# Altium PCB SPARTAN MINI HW2.0 PCB.PcbDoc
Units mm, origin at the board's own origin, x right, y up, seen from the top; angles counter-clockwise.
Board outline 70.1 x 20.1 mm, 2 copper layers (Top Layer, Bottom Layer); 77 components, 53 nets, 231 pads, 0 vias.
Unrouted connection lines stored in the file: 141.
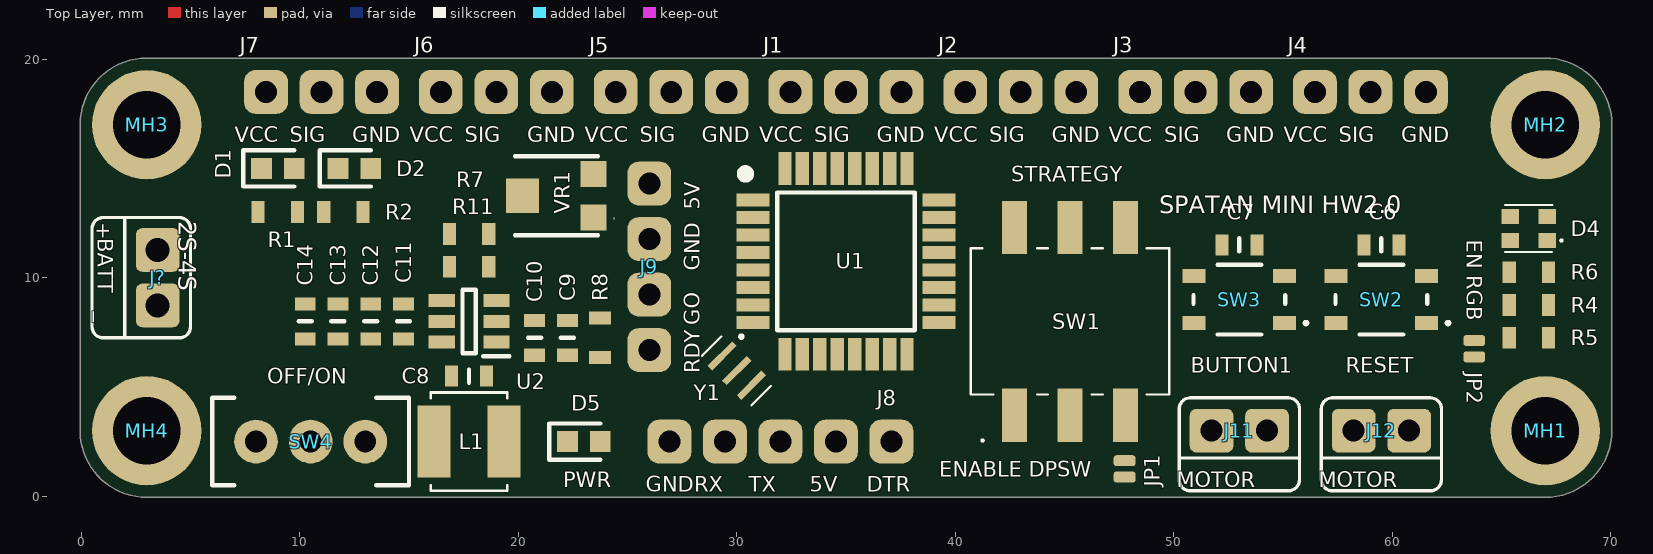
[diagram p0: Top Layer view]
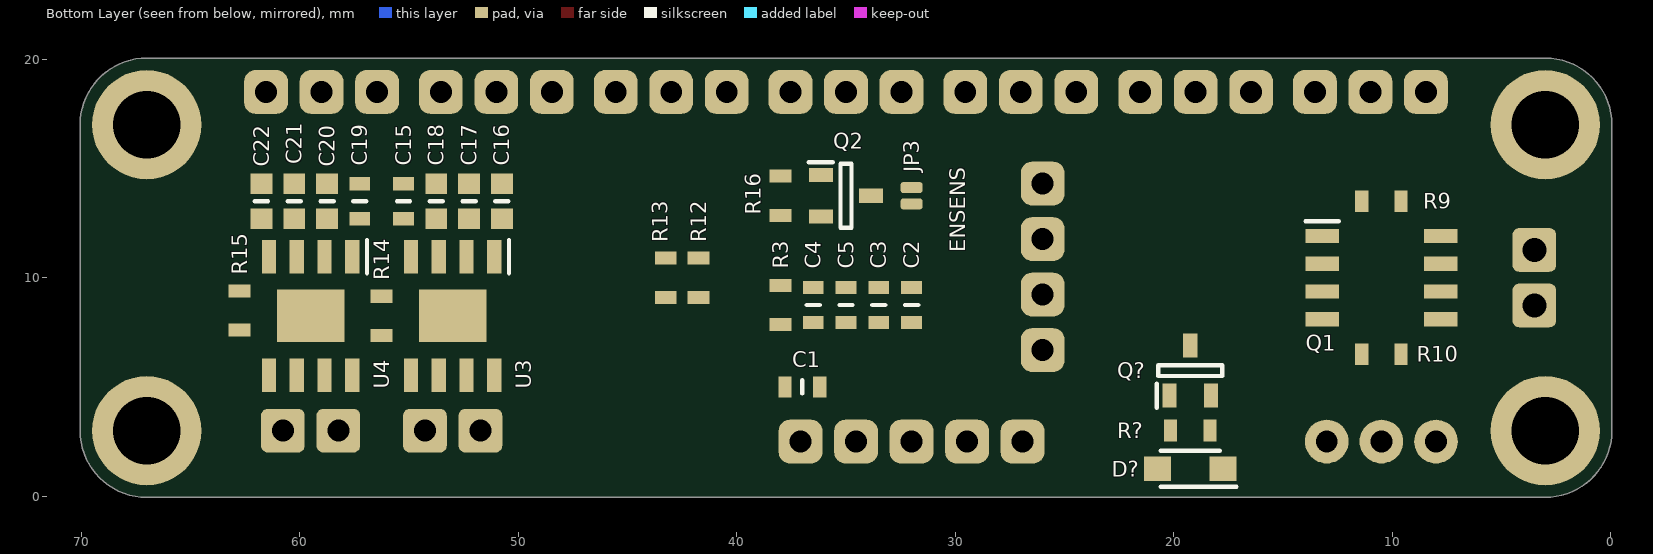
[diagram p1: Bottom Layer view, seen from below]

## Layer stack, top to bottom
Top Solder: solder mask 0.0102, Solder Resist, Dk 3.5
Top Layer: signal copper 0.0356
Dielectric 1: dielectric 0.32, FR-4, Dk 4.8
Bottom Layer: signal copper 0.0356
Bottom Solder: solder mask 0.0102, Solder Resist, Dk 3.5

## Board outline
3,-0.05 cw(c3,3) -0.05,3 -0.05,17 cw(c3,17) 2.999,20.05 3,20.05 66,20.05 67,20.05 cw(c67,17) 70.05,17 70.05,3 cw(c67,3) 67,-0.05 4,-0.05

## Design rules (kind name [scope] priority, off if disabled: settings)
Clearance [All] p1: gap=0.254 ignorepadtopadclearanceinfootprint=FALSE except(0: Arc-Hole Track-Hole SMDPad-Hole THPad-Hole Via-Hole Fill-Hole Poly-Hole Region-Hole Text-Hole)
PolygonConnect [All] p1: connectstyle=Relief reliefconductorwidth=0.254 reliefentries=4 polygonreliefangle="90 Angle" airgapwidth=0.254
RoutingVias [All] p1: holewidth=0.711 width=1.27 viastyle="Through Hole" minholewidth=0.711 minwidth=1.27 maxholewidth=0.711 maxwidth=1.27
SolderMaskExpansion [All] p1: expansion=0.102 istentingtop=FALSE
Width [All] p1: maxlimit=0.254 minlimit=0.254 preferedwidth=0.254
30 further rules are at their usual default settings.

## Classes and differential pairs
component class POWER: C8 C9 C10 C11 C12 C13 C14 C15 C16 C17 C18 C19 C20 C21 C22 D5 D? J11 J12 J? JP3 L1 MH1 MH2 MH3 MH4 Q1 Q2 Q? R7 R8 R9 R10 R11 R12 R13 R14 R15 R16 R? SW4 U2 U3 U4
component class LOGIC: C1 C2 C3 C4 C5 C6 C7 D1 D2 D4 J1 J2 J3 J4 J5 J6 J7 J8 J9 JP1 JP2 R1 R2 R3 R4 R5 R6 SW1 SW2 SW3 U1 VR1 Y1

## Components (designator, comment, footprint, x,y, rotation, side; value= is the part's Value field where it differs from the comment)
C1 "0.1uF" CAP0603 37,5 r0 bottom
C2 "0.1uF" CAP0603 32,8.75 r90 bottom
C3 "0.1uF" CAP0603 33.5,8.75 r90 bottom
C4 "0.1uF" CAP0603 36.5,8.75 r90 bottom
C5 "0.1uF" CAP0603 35,8.75 r90 bottom
C6 "1uF" CAP0603 59.5,11.5 r0 top
C7 "1uF" CAP0603 53,11.5 r0 top
C8 "0.1uF" CAP0603 17.75,5.5 r180 top
C9 "10uF" CAP0603 22.25,7.25 r270 top
C10 "10uF" CAP0603 20.75,7.25 r270 top
C11 "1uF" CAP0603 14.75,8 r270 top
C12 "1uF" CAP0603 13.25,8 r270 top
C13 "1uF" CAP0603 11.75,8 r270 top
C14 "0.1uF" CAP0603 10.25,8 r270 top
C15 "0.1uF" CAP0603 55.25,13.5 r270 bottom
C16 "C22uF" CAP0805 50.75,13.5 r270 bottom
C17 "C22uF" CAP0805 52.25,13.5 r270 bottom
C18 "C22uF" CAP0805 53.75,13.5 r270 bottom
C19 "0.1uF" CAP0603 57.25,13.5 r270 bottom
C20 "C22uF" CAP0805 58.75,13.5 r270 bottom
C21 "C22uF" CAP0805 60.25,13.5 r270 bottom
C22 "C22uF" CAP0805 61.75,13.5 r270 bottom
D1 "G" "LED0603 GREEN" 9,15 r0 top
D2 "R" "LED0603 RED" 12.5,15 r0 top
D4 "RGB" "LED RGB FM-B2020RGBA-HG" 66.25,12.25 r0 top
D5 "PWR" "LED0603 RED" 23,2.5 r0 top
D? "MBR120LSFT1" SOD-123 19.25,1.25 r0 bottom
J1 "GENERIC SENSOR 3X" "PINHEADER SENSOR CONNECTOR 3X" 35,18.5 r0 top
J2 "GENERIC SENSOR 3X" "PINHEADER SENSOR CONNECTOR 3X" 43,18.5 r0 top
J3 "GENERIC SENSOR 3X" "PINHEADER SENSOR CONNECTOR 3X" 51,18.5 r0 top
J4 "GENERIC SENSOR 3X" "PINHEADER SENSOR CONNECTOR 3X" 59,18.5 r0 top
J5 "GENERIC SENSOR 3X" "PINHEADER SENSOR CONNECTOR 3X" 27,18.5 r0 top
J6 "GENERIC SENSOR 3X" "PINHEADER SENSOR CONNECTOR 3X" 19,18.5 r0 top
J7 "GENERIC SENSOR 3X" "PINHEADER SENSOR CONNECTOR 3X" 11,18.5 r0 top
J8 "FTDI CUST" "UART PROG CONN" 32,2.5 r0 top
J9 "RTT" "ING. MAKER RTT" 26,10.5 r90 top
J11 "MOTOR CONN SMALL" "MOTOR CONN SMALL" 53,3 r0 top
J12 "MOTOR CONN SMALL" "MOTOR CONN SMALL" 59.5,3 r0 top
J? "LIPO" "BATTERY CONNECTOR SMALL" 3.5,10 r270 top
JP1 "ENABLE DPSW" "JUMPER 2 PADS" 47.75,1.25 r90 top
JP2 "EN RGB" "JUMPER 2 PADS" 63.75,6.75 r90 top
JP3 "ENSENS" "JUMPER 2 PADS" 32,13.75 r90 bottom
L1 "6.8uH/1.9A" "INDUCTOR 4mm x 4mm x 2mm" 17.75,2.5 r0 top
MH1 "HOLE 3.1mm" "HOLE 3.1mm" 67,3 r0 top
MH2 "HOLE 3.1mm" "HOLE 3.1mm" 67,17 r0 top
MH3 "HOLE 3.1mm" "HOLE 3.1mm" 3,17 r0 top
MH4 "HOLE 3.1mm" "HOLE 3.1mm" 3,3 r0 top
Q1 "30V/8A" SOIC-8 10.5,10 r180 bottom
Q2 "FDN338P" SOT-25-3 35,13.75 r180 bottom
Q? "FDN338P" SOT-25-3 19.25,5.75 r90 bottom
R1 "10KΩ" RES0603 9,13 r180 top
R2 "10KΩ" RES0603 12,13 r180 top
R3 "10KΩ" RES0603 38,8.75 r90 bottom
R4 "10KΩ" RES0603 66.25,8.75 r0 top
R5 "10KΩ" RES0603 66.25,7.25 r0 top
R6 "10KΩ" RES0603 66.25,10.25 r0 top
R7 "88.7KΩ" RES0603 17.75,12 r0 top
R8 "1KΩ" RES0603 23.75,7.25 r270 top
R9 "10KΩ" RES0603 10.5,13.5 r0 bottom
R10 "10KΩ" RES0603 10.5,6.5 r180 bottom
R11 "22.1KΩ" RES0603 17.75,10.5 r0 top
R12 "47KΩ" RES0603 41.75,10 r90 bottom
R13 "4.7K" RES0603 43.25,10 r270 bottom
R14 "18KΩ" RES0603 56.25,8.25 r90 bottom
R15 "18KΩ" RES0603 62.75,8.5 r90 bottom
R16 "10KΩ" RES0603 38,13.75 r90 bottom
R? "10KΩ" RES0603 19.25,3 r180 bottom
SW1 "STRATEGY" 2193MSTR 45.25,8 r0 top
SW2 "RESET" PTS810SJK250SMTRLFS 59.5,9 r180 top
SW3 "BUTTON1" PTS810SJK250SMTRLFS 53,9 r180 top
SW4 "OFF/ON" SS12D00 10.5,2.5 r90 top
U1 "ATMEGA328P-AU" TQFP-32 35,10.75 r0 top
U2 "LMR50410YQDBVRQ1" SOT23-6 17.75,8 r180 top
U3 "DRV8871DDA" "HSOP8 EP" 53,8.25 r270 bottom
U4 "DRV8871DDA" "HSOP8 EP" 59.5,8.25 r270 bottom
VR1 "10KΩ" TC33X2503E 21.75,13.75 r90 top
Y1 "16MHZ" CSTCE16M0V53R0 30,5.75 r135 top

## Footprints (in the part's own frame and the unit in brackets; to place one, negate y for a bottom-side part, rotate by r counter-clockwise, add the part's x,y. Pads: shape width x height; smd on the part's side, far side on the other; paste and mask are expansions set on the pad)
2193MSTR [mm]
  rect 1.13x2.44 smd: 1(-2.54,-4.3) 2(0,-4.3) 3(2.54,-4.3) 4(2.54,4.3) 5(0,4.3) 6(-2.54,4.3)
  silkscreen extent -4.54,-5.5 4.54,3.35, body extent -4.28,-4.9 4.28,4.9, height 4.36
"BATTERY CONNECTOR SMALL" [mm]
  rrect30% 2x2 hole 1.1: 1(-1.27,0) 2(1.27,0)
  silkscreen extent -2.75,-3 2.75,1.5
CAP0603 [mm]
  rect 0.6x0.95 smd: 1(-0.8,0) 2(0.8,0)
  silkscreen extent 0,-0.3 0,0.3, body extent -0.8,-0.4 0.8,0.4, height 0.8
CAP0805 [mm]
  rect 0.95x1 smd: 1(-0.8,0) 2(0.8,0)
  silkscreen extent 0,-0.3 0,0.3, body extent -0.8,-0.4 0.8,0.4, height 0.8
CSTCE16M0V53R0 [mm]
  rect 0.3x1.6 smd: 1(0.95,0) 2(0,0) 3(-0.95,0)
  silkscreen extent -1.6,-1.3 1.6,0.65, body extent -1.6,-0.65 1.6,0.65, height 0.7
"HOLE 3.1mm" [mm]
  round 5 hole 3.1: 13(0,0)
"HSOP8 EP" [mm] "EMPAQUETADO HSOP8 CON TERMAL EXPOSED PAD"
  rect 1.525x0.65 smd: 1(-2.712,1.905) 2(-2.712,0.635) 3(-2.712,-0.635) 4(-2.712,-1.905) 5(2.712,-1.905) 6(2.712,-0.635) 7(2.712,0.635) 8(2.712,1.905)
  rect 2.4x3.1 smd: 9(0,0)
  silkscreen extent -3.47,2.58 -1.95,2.58, body extent -3,-2.45 3,2.45, height 1.57
"INDUCTOR 4mm x 4mm x 2mm" [mm]
  rect 1.5x3.3 smd: 1(-1.6,0) 2(1.6,0)
  silkscreen extent -1.75,-2.25 1.75,2.25, body extent -2,-2.02 2,2, height 2.01
"ING. MAKER RTT" [mm]
  rrect50% 2x2 hole 1: 1(3.81,0) 2(1.27,0) 3(-1.27,0) 4(-3.81,0)
  body extent -5.06,-1.25 5.06,1.25, height 8.5
"JUMPER 2 PADS" [mm]
  rrect50% 0.5x1 smd: 1(-0.375,0) 2(0.375,0)
"LED0603 GREEN" [mm]
  rect 0.95x0.95 smd: 1(-0.75,0) 2(0.75,0)
  silkscreen extent -1.58,-0.82 0.75,0.82, body extent -0.8,-0.4 0.8,0.4, height 0.54
"LED0603 RED" [mm]
  rect 0.95x0.95 smd: 1(-0.75,0) 2(0.75,0)
  silkscreen extent -1.58,-0.82 0.75,0.82, body extent -0.8,-0.4 0.8,0.4, height 0.54
"LED RGB FM-B2020RGBA-HG" [mm]
  rect 0.8x0.7 smd: 1(0.85,-0.55) 2(-0.85,-0.55) 3(-0.85,0.55) 4(0.85,0.55)
  silkscreen extent -1.08,-1.08 1.54,1.08, body extent -1.05,-1.05 1.05,1.05, height 1.01
"MOTOR CONN SMALL" [mm]
  rrect30% 2x2 hole 1: 1(-1.27,0) 2(1.27,0)
  silkscreen extent -2.75,-2.75 2.75,1.5
"PINHEADER SENSOR CONNECTOR 3X" [mm]
  rrect50% 2x2 hole 1: 2(-2.54,0) 3(0,0) 4(2.54,0)
PTS810SJK250SMTRLFS [mm]
  rect 1.05x0.65 smd: 1(-2.075,1.075) 2(2.075,1.075) 3(-2.075,-1.075) 4(2.075,-1.075)
  silkscreen extent -3.1,-1.6 2.1,1.6, body extent -2.3,-1.6 2.3,1.6, height 2.7
RES0603 [mm]
  rect 0.6x1 smd: 1(-0.9,0) 2(0.9,0)
  body extent -0.8,-0.4 0.8,0.4, height 0.55
SOD-123 [mm]
  rect 1.24x1.12 smd: 1(-1.5,0) 2(1.5,0)
  silkscreen extent -2.12,-0.82 1.35,0.82, body extent -1.88,-0.85 1.88,0.85, height 1.2
SOIC-8 [mm] "EMPAQUETADO HSOP8 CON TERMAL EXPOSED PAD"
  rect 1.525x0.65 smd: 1(-2.712,1.905) 2(-2.712,0.635) 3(-2.712,-0.635) 4(-2.712,-1.905) 5(2.712,-1.905) 6(2.712,-0.635) 7(2.712,0.635) 8(2.712,1.905)
  silkscreen extent -3.47,2.58 -1.95,2.58, body extent -3,-2.45 3,2.45, height 1.57
SOT23-6 [mm]
  rect 1.2x0.6 smd: 1(-1.25,0.95) 2(-1.25,0) 3(-1.25,-0.95) 4(1.25,-0.95) 5(1.25,0) 6(1.25,0.95)
  silkscreen extent -1.85,-1.45 0.3,1.6, body extent -1.4,-1.45 1.4,1.45, height 1.2
SOT-25-3 [mm]
  rect 1.1x0.65 smd: 1(-1.15,0.95) 2(-1.15,-0.95) 3(1.15,0)
  silkscreen extent -1.7,-1.46 0.25,1.53, body extent -1.25,-1.46 1.25,1.46, height 1.12
SS12D00 [mm]
  round 2 hole 1: 1(0,-2.5) 2(0,0) 3(0,2.5)
  silkscreen extent -2,-4.5 2,4.5, body extent -1.75,-4.25 1.75,4.25, height 6.21
TC33X2503E [mm]
  rect 1.2x1.2 smd: 1(-1,-1.7) 3(1,-1.7)
  rect 1.6x1.5 smd: 2(0,1.55)
  silkscreen extent -1.8,-2.64 1.8,1.9, body extent -1.5,-2 1.5,1.8, height 1.22
TQFP-32 [mm]
  rect 1.5x0.6 smd: 1(-4.25,2.8) 2(-4.25,2) 3(-4.25,1.2) 4(-4.25,0.4) 5(-4.25,-0.4) 6(-4.25,-1.2) 7(-4.25,-2) 8(-4.25,-2.8) 17(4.25,-2.8) 18(4.25,-2) 19(4.25,-1.2) 20(4.25,-0.4) 21(4.25,0.4) 22(4.25,1.2) 23(4.25,2) 24(4.25,2.8)
  rect 0.6x1.5 smd: 9(-2.8,-4.25) 10(-2,-4.25) 11(-1.2,-4.25) 12(-0.4,-4.25) 13(0.4,-4.25) 14(1.2,-4.25) 15(2,-4.25) 16(2.8,-4.25) 25(2.8,4.25) 26(2,4.25) 27(1.2,4.25) 28(0.4,4.25) 29(-0.4,4.25) 30(-1.2,4.25) 31(-2,4.25) 32(-2.8,4.25)
  silkscreen extent -4.8,-3.15 3.15,4.2, body extent -4.5,-4.5 4.5,4.5, height 1.2
"UART PROG CONN" [mm]
  rrect50% 2x2 hole 1: 5V(2.54,0) DTR(5.08,0) GND(-5.08,0) RX(-2.54,0) TX(0,0)
  body extent -6.34,-1.25 6.32,1.25, height 8.51

## Part data
C1 C2 C3 C4 C5 C15 C19: library part "C0.1uF 25V X7R", "Capacitor, Multilayer, Ceramic, 25V, 10%, X7R, 15% Tc, 0.1Uf, Surface Mount, 0603", Capacitance=100nF, Case Code (Imperial)=0603, Case Code (Metric)=1608, Dielectric=X7R, Dielectric Material=Ceramic, Manufacturer=KEMET, Manufacturer Part Number=C0603C104K3RACTU, Max Operating Temperature=125°C, Min Operating Temperature=-55°C, Package Quantity=1, Temperature Coefficient=30ppm/°C, Tolerance=10%, Voltage=25V, Case/Package=0603, Category="Ceramic Capacitors", Construction=Flat, Depth=0.8mm, Dissipation Factor=3.5%, Height=0.8mm, Lead Free=5697LeadFree, Lead Pitch=0.7mm, Length=1.6mm, Material=4241ConductorMaterial, Mount="Surface Mount,PCB", Number of Pins=2, Packaging="Tape and Reel", Pricing 1="1=0.19, 10=0.12, 50=0.12, 100=0.062, 1000=0.041, 10000=0.024 (USD)", Radiation Hardening=No, Reach SVHC Compliant=No, RoHS=Yes, RoHS Compliant=Yes, Series=C, Stock 1=364631, Supplier 1=Mouser, Termination=SMD/SMT, Thickness=0.034inch, Voltage Rating=25V, Voltage Rating (DC)=25V, Width=0.031inch
C6 C7 C11 C12 C13: library part "C1uF 50V X5R", "Multilayer Ceramic Capacitor, 1 uF, 50 V, ï¿½ 10%, X5R, 0603 [1608 Metric]", Case Code (Imperial)=0603, Case Code (Metric)=1608, Dielectric=X5R, Dielectric Material=4241ConductorMaterial, Manufacturer=TDK, Manufacturer Part Number=C1608X5R1H105K080AB, Max Operating Temperature=85°C, Min Operating Temperature=-55°C, Package Quantity=1, Tolerance=10%, Voltage=50V, Capacitance=1uF, Case/Package=0603, Category="Ceramic Capacitors", Construction=Flat, Depth=0.8mm, Height=0.8mm, Lead Free="Lead Free", Length=1.6mm, Material=Ceramic, Mount="Surface Mount", Number of Pins=2, Packaging="Tape and Reel", Pricing 1="1=0.14, 10=0.078, 50=0.078, 100=0.05, 1000=0.035, 10000=0.023 (USD)", Reach SVHC Compliant=No, RoHS=Yes, RoHS Compliant=Yes, Series=C, Stock 1=142150, Supplier 1=Mouser, Thickness=0.035inch, Voltage Rating=50V, Width=0.031inch
C8 C14: library part "C0.1uF 50V X7R", "Multilayer Ceramic Capacitor, 0.1 uF, 50 V, ï¿½ 10%, X7R, 0603 [1608 Metric]", Capacitance=100nF, Case Code (Imperial)=0603, Case Code (Metric)=1608, Dielectric=X7R, Manufacturer=Murata, Manufacturer Part Number=GCM188R71H104KA57J, Max Operating Temperature=125°C, Min Operating Temperature=-55°C, Package Quantity=1, Ratings=AEC-Q200, Tolerance=10%, Voltage Rating=50V, Case/Package=0603, Category="Ceramic Capacitors", Construction=Flat, Depth=0.8mm, Height=0.8mm, Lead Free="Lead Free", Length=1.6mm, Material=Ceramic, Mount="Surface Mount", Packaging="Tape and Reel", Pricing 1="1=0.18, 10=0.076, 50=0.076, 100=0.051, 1000=0.046, 10000=0.037 (USD)", Radiation Hardening=No, RoHS=Yes, RoHS Compliant=Yes, Series=GCM, Stock 1=536618, Supplier 1=Mouser, Termination=SMD/SMT, Thickness=0.035inch, Voltage Rating (DC)=50V, Width=0.031inch
C9 C10: library part "C10uF 10uF X5R", "Multilayer Ceramic Capacitor, 10 uF, 10 V, ï¿½ 20%, X5R, 0603 [1608 Metric]", Case Code (Imperial)=0603, Case Code (Metric)=1608, Dielectric=X5R, Manufacturer=Murata, Manufacturer Part Number=GRM188R61A106ME69D, Max Operating Temperature=85°C, Min Operating Temperature=-55°C, Package Quantity=4000, Tolerance=20%, Voltage Rating=10V, Capacitance=10uF, Case/Package=0603, Category="Ceramic Capacitors", ComponentLink7Description=http://www.farnell.com/datasheets/1872210.pdf?src-supplier=Newark, ComponentLink7URL=http://www.farnell.com/datasheets/1872210.pdf?src-supplier=Newark, ComponentLink8Description=https://datasheet.octopart.com/GRM188R61A106ME69D-Murata-datasheet-165579666.pdf?src-supplier=TME, ComponentLink8URL=https://datasheet.octopart.com/GRM188R61A106ME69D-Murata-datasheet-165579666.pdf?src-supplier=TME, Height=0.8mm, Lead Free="Lead Free", Length=1.6mm, Material=Ceramic, Mount="Surface Mount", Number of Pins=2NUMBER, Packaging="Tape and Reel", Pricing 1="1=0.13, 10=0.078, 50=0.078, 100=0.044, 1000=0.03, 10000=0.02 (USD)", Reach SVHC Compliant=Unknown, RoHS=Yes, RoHS Compliant=Yes, Series=GRM, Stock 1=58993, Supplier 1=Mouser, Termination=SMD/SMT, Thickness=0.035inch, Voltage Rating (DC)=10V, Weight=0.000222oz, Width=0.8mm
C16 C17 C18 C20 C21 C22: library part "C22uF 25V X5R", "Cap, 22Uf, 25V, Mlcc, 0805 Rohs Compliant: Yes", Capacitance=22uF, Case Code (Imperial)=0805, Case Code (Metric)=2012, Dielectric=X5R, Manufacturer=Murata, Manufacturer Part Number=GRM21BR61E226ME44K, Max Operating Temperature=85°C, Min Operating Temperature=-55°C, Package Quantity=10000, Tolerance=20%, Voltage Rating=25V, Case/Package=0805, Category="Ceramic Capacitors", Height=1.25mm, Length=0.079inch, Material=Ceramic, Mount="Surface Mount", Packaging="Tape and Reel", Pricing 1="1=0.39, 10=0.168, 50=0.168, 100=0.114, 1000=0.099, 10000=0.07 (USD)", RoHS=Yes, RoHS Compliant=Yes, Series=GRM, Stock 1=137577, Supplier 1=Mouser, Termination=SMD/SMT, Thickness=0.057inch, Voltage Rating (DC)=25V, Weight=0.000335oz, Width=1.25mm
D1: library part "GREEN LED 0603", "WURTH ELEKTRONIK - 150060VS75000 - LED, Green, SMD, 0603, 30 mA, 2 V, 570 nm", Case Code (Imperial)=0603, Case Code (Metric)=1608, Color=Green, Forward Current=20mA, Forward Voltage=2V, Lens Color=Colorless, Manufacturer="Wurth Electronics", Manufacturer Part Number=150060VS75000, Max Operating Temperature=85°C, Max Reverse Voltage (DC)=5V, Min Operating Temperature=-40°C, Package Quantity=4000, Power Dissipation=72mW, Case/Package=0603, Category=LEDs, Dominant Wavelength=570nm, Height=0.8mm, Illumination Color=Green, Length=1.6mm, Lens Size=0.7mm, Lens Style=Rectangular,Flat, Lens Transparency=Clear, Luminous Intensity=40mcd, Mount="Surface Mount", Number of Pins=2, Packaging="Cut Tape", Power Rating=72mW, Pricing 1="1=0.14, 10=0.14, 50=0.127, 100=0.109, 1000=0.101, 10000=0.101 (USD)", Reach SVHC Compliant=Unknown, Reverse Voltage=5V, Reverse Voltage (DC)=5V, RoHS=Yes, RoHS Compliant=Yes, Series=WL-SMCW, Stock 1=15118, Supplier 1=Mouser, Test Current=20mA, Viewing Angle=140°, Weight=0.000882oz, Width=0.8mm
D2 D5: library part "RED LED 0603", "Led, Red, 630 Nm, 1.9 V, 30 Ma, 60 Mcd Rohs Compliant: Yes", Case Code (Imperial)=0603, Case Code (Metric)=1608, Color=Red, Forward Current=30mA, Forward Voltage=1.9V, Lens Color=Colorless, Manufacturer="Wurth Electronics", Manufacturer Part Number=150060SS75000, Max Operating Temperature=85°C, Max Reverse Voltage (DC)=5V, Min Operating Temperature=-40°C, Package Quantity=1, Test Current=20mA, Case/Package=0603, Category=LEDs, Dominant Wavelength=630nm, Height=0.8mm, Length=1.6mm, Lens Size=0.7mm, Lens Style=Clear,Flat,Rectangular, Lens Transparency=Clear, Luminous Intensity=60mcd, Mount="Surface Mount", Packaging="Cut Tape", Pricing 1="1=0.15, 10=0.15, 50=0.142, 100=0.122, 1000=0.116, 10000=0.116 (USD)", Reach SVHC Compliant=Unknown, RoHS=Yes, RoHS Compliant=Yes, Series=WL-SMCW, Stock 1=8814, Supplier 1=Mouser, Viewing Angle=140°, Wavelength=630nm, Width=0.8mm
D4: library part "RGB LED FM-B2020RGBA-HG", "LED RGB"
D?: Average Rectified Current=1A, Case/Package=SOD, Forward Voltage=260mV, Manufacturer 1=onsemi, Manufacturer Lifecycle Status=ACTIVE, Manufacturer Part Number=MBR120LSFT1G, Max Forward Surge Current (Ifsm)=50A, Max Operating Temperature=125°C, Max Repetitive Reverse Voltage (Vrrm)=20V, Max Reverse Leakage Current=400µA, Min Operating Temperature=-55°C, Supplier Part Number 1=863-MBR120LSFT1G, Category="Schottky Diodes", China RoHS=Non-Compliant, ComponentLink1Description=https://datasheet.octopart.com:443/MBR120LSFT1G-ON-Semiconductor-datasheet-37114088.pdf?src-supplier=Newark, ComponentLink1URL=https://datasheet.octopart.com:443/MBR120LSFT1G-ON-Semiconductor-datasheet-37114088.pdf?src-supplier=Newark, ComponentLink2Description=https://datasheet.octopart.com:443/MBR120LSFT1G-onsemi-datasheet-181959027.pdf?src-supplier=Newark, ComponentLink2URL=https://datasheet.octopart.com:443/MBR120LSFT1G-onsemi-datasheet-181959027.pdf?src-supplier=Newark, ComponentLink3Description=https://datasheet.octopart.com:443/MBR120LSFT1G-onsemi-datasheet-180961601.pdf?src-supplier=IHS, ComponentLink3URL=https://datasheet.octopart.com:443/MBR120LSFT1G-onsemi-datasheet-180961601.pdf?src-supplier=IHS, ComponentLink4Description=https://datasheet.octopart.com:443/MBR120LSFT1G-ON-Semiconductor-datasheet-11730539.pdf?src-supplier=onsemi, ComponentLink4URL=https://datasheet.octopart.com:443/MBR120LSFT1G-ON-Semiconductor-datasheet-11730539.pdf?src-supplier=onsemi, ComponentLink5Description=https://datasheet.octopart.com:443/MBR120LSFT1G-onsemi-datasheet-189129223.pdf?src-supplier=Master+Electronics, ComponentLink5URL=https://datasheet.octopart.com:443/MBR120LSFT1G-onsemi-datasheet-189129223.pdf?src-supplier=Master+Electronics, ComponentLink6Description=https://datasheet.octopart.com:443/MBR120LSFT1G-ON-Semiconductor-datasheet-14054996.pdf?src-supplier=iiiC, ComponentLink6URL=https://datasheet.octopart.com:443/MBR120LSFT1G-ON-Semiconductor-datasheet-14054996.pdf?src-supplier=iiiC, ComponentLink7Description=https://datasheet.octopart.com:443/MBR120LSFT1G-ON-Semiconductor-datasheet-9696420.pdf?src-supplier=RS+(Formerly+Allied+Electronics), ComponentLink7URL=https://datasheet.octopart.com:443/MBR120LSFT1G-ON-Semiconductor-datasheet-9696420.pdf?src-supplier=RS+(Formerly+Allied+Electronics), ComponentLink8Description=https://datasheet.octopart.com:443/MBR120LSFT1G-ON-Semiconductor-datasheet-7627526.pdf?src-supplier=Farnell, ComponentLink8URL=https://datasheet.octopart.com:443/MBR120LSFT1G-ON-Semiconductor-datasheet-7627526.pdf?src-supplier=Farnell, ComponentLink9Description=http://sigma.octopart.com:80/15540786/rohs_certificate/ON-Semiconductor-MBR120LSFT1G.pdf?src-supplier=Compliance+Statements, ComponentLink9URL=http://sigma.octopart.com:80/15540786/rohs_certificate/ON-Semiconductor-MBR120LSFT1G.pdf?src-supplier=Compliance+Statements, ComponentLink10Description=http://sigma.octopart.com:80/15677548/materials_sheet/ON-Semiconductor-MBR120LSFT1G.csv?src-supplier=Compliance+Statements, ComponentLink10URL=http://sigma.octopart.com:80/15677548/materials_sheet/ON-Semiconductor-MBR120LSFT1G.csv?src-supplier=Compliance+Statements, ComponentLink11Description=http://sigma.octopart.com:80/150613994/rohs_statement/ON-Semiconductor-MBR120LSFT1G.pdf?src-supplier=Compliance+Statements, ComponentLink11URL=http://sigma.octopart.com:80/150613994/rohs_statement/ON-Semiconductor-MBR120LSFT1G.pdf?src-supplier=Compliance+Statements, ComponentLink12Description=http://sigma.octopart.com:80/reach_statement/ON-Semiconductor-company-79.pdf?src-supplier=Compliance+Statements, ComponentLink12URL=http://sigma.octopart.com:80/reach_statement/ON-Semiconductor-company-79.pdf?src-supplier=Compliance+Statements, ComponentLink13Description=https://octopart.com:443/opatz8j6/c1?t=2ICm1KeR9lqrV-9whfkRA44D3hFx6PDn5_A0MNxFaUdO4o5v_qbxEQPqTntcuO9N9I3hBniUpCqfMINp71cVvkdTpURQmko4dTX9rqde5Cf3VpgdAg3K1o248i4HBmP2_Tqq0p1F2ZkX7mjILE2AnxaiCcHqPARINWibdNJrEXxGnKJ2LOOWxijYCJAy5qO9kqDGptRk1NR4nN1jM9RzpulMHVN6BX3o5gIy6SSuhGuPyfLXACdfid-I2n-Y79NBPAbqEzQ3NwqY6QVlWxJCXx6kK7Q54A-YGddcguNVCHVmu2SuXJWcng26o0vyuol0iwIubwc4zHmzf-HtHLnuieEvTO6SMEg9_DpQOA&src-supplier=Compliance+Statements, ComponentLink13URL=https://octopart.com:443/opatz8j6/c1?t=2ICm1KeR9lqrV-9whfkRA44D3hFx6PDn5_A0MNxFaUdO4o5v_qbxEQPqTntcuO9N9I3hBniUpCqfMINp71cVvkdTpURQmko4dTX9rqde5Cf3VpgdAg3K1o248i4HBmP2_Tqq0p1F2ZkX7mjILE2AnxaiCcHqPARINWibdNJrEXxGnKJ2LOOWxijYCJAy5qO9kqDGptRk1NR4nN1jM9RzpulMHVN6BX3o5gIy6SSuhGuPyfLXACdfid-I2n-Y79NBPAbqEzQ3NwqY6QVlWxJCXx6kK7Q54A-YGddcguNVCHVmu2SuXJWcng26o0vyuol0iwIubwc4zHmzf-HtHLnuieEvTO6SMEg9_DpQOA&src-supplier=Compliance+Statements, ComponentLink14Description=https://octopart.com:443/opatz8j6/c1?t=zeIKbDt2eKZzl5z0s2d0QXLtLt33CcwbWtIpUrrxX6AQ_NOZh8tXX2U6z3WNFk5ZgTTYPjrCGpkSHdRB9hEcX87d4aeyW43j9K4kV5xXxBI5dhp4Lp7JiTCGRllsIHUnkxjzaeeOuBUZnKdin1SUBQLJjMUCP331XZ_QTEPzaJ02iVbVtCio5r30wRQ6LXHyGXZLbm5qxXfvPbzngscoaQnjezbRah5IcHlnvDuzP48aZQf0lCBqBb6eZNAZu8QrR18-Tx1o75ATaRdDtsuZ1RvJ9-ZJ7qCUmOCGYE99BFGUz1ssMVvNlkohtdnTs6H-XEVN_lX6IKEVYNHLhYTSqeOaaX24JdcNZXKJ5Gs&src-supplier=Compliance+Statements, ComponentLink14URL=https://octopart.com:443/opatz8j6/c1?t=zeIKbDt2eKZzl5z0s2d0QXLtLt33CcwbWtIpUrrxX6AQ_NOZh8tXX2U6z3WNFk5ZgTTYPjrCGpkSHdRB9hEcX87d4aeyW43j9K4kV5xXxBI5dhp4Lp7JiTCGRllsIHUnkxjzaeeOuBUZnKdin1SUBQLJjMUCP331XZ_QTEPzaJ02iVbVtCio5r30wRQ6LXHyGXZLbm5qxXfvPbzngscoaQnjezbRah5IcHlnvDuzP48aZQf0lCBqBb6eZNAZu8QrR18-Tx1o75ATaRdDtsuZ1RvJ9-ZJ7qCUmOCGYE99BFGUz1ssMVvNlkohtdnTs6H-XEVN_lX6IKEVYNHLhYTSqeOaaX24JdcNZXKJ5Gs&src-supplier=Compliance+Statements, Contact Plating=Tin, Country of Origin=Malaysia, Current Rating=1A, Description 1="Rectifier Diode Schottky Si 20V 1A 2-Pin SOD-123FL T/R / DIODE SCHOTTKY 20V 1A SOD123L", Element Configuration=Single, Export Control Classification Number (ECCN) Code=EAR99, Forward Current=1A, Halogen Free="Halogen Free", Harmonized Tariff Schedule (HTS) Code=8541.10.00.80, Height=880µm, Introduction Date=2002-10-09, Lead Free="Lead Free", Length=2.9mm, Lifecycle Status=Production, Max Output Current=1A, Max Reverse Voltage (DC)=20V, Max Surge Current=50A, Number of Elements=1, Number of Pins=2, Number of Terminals=2, Output Current=1A, Packaging="Tape and Reel", Peak Non-Repetitive Surge Current=50A, Peak Reverse Current=400µA, Polarity=Standard, Pricing="1=0.59, 10=0.364, 50=0.364, 100=0.232, 1000=0.156, 10000=0.104 (USD)", Radiation Hardening=No, REACH SVHC=No, Reverse Standoff Voltage=20V, RoHS=Compliant, Schedule B=8541100080, Stock=5212, Supplier 1=Mouser, Voltage Rating (DC)=20V, Width=1.8mm
J1 J2 J3 J4 J5 J6 J7: "PADS PARA CONECTAR UN SENSOR CON 1 LINEA DE VOLTAJE INDEPENDIENTE."
J8: library part "UART PROG", "GENERIC UART PROGRAMING PORT FOR ARDUINO CUSTOM BOARDS"
J9: library part "ING. MAKER RTT", "CONECTOR PINHEADER PARA ARRANCADPR ING. MAKER"
J11 J12: "CONECTOR PARA MOTORES, ESPACIADO DE 2.54MM"
J?: library part "BATT CONN SMALL", "CONECTOR PARA BATERIA, ESPACIADO DE 2.54MM"
JP1 JP2 JP3: library part "SINGLE JUMPER NO", "JUMPER SMD CON 2 PADS NORMALMENTE ABIERTO"
L1: library part "INDUCTOR 6.8uH/1.9A 74405042068", "Power Inductors - SMD WE-LQSH 6.8uH 1.9A DCR=156mOhms AECQ200 4mm X 4mm X 2mm", Ambient Temperature Range High=85°C, Ambient Temperature Range Low=-40°C, Current Rating=1.9A, DC Resistance (DCR)=130mΩ, Inductance=6.8µH, Inductance Tolerance=20%, Manufacturer 1="Wurth Elektronik", Manufacturer Part Number=74405042068, Max Operating Temperature=120°C, Supplier Part Number 1=710-74405042068, Category="Fixed Inductors", ComponentLink1Description=https://datasheet.octopart.com:443/74405042068-Wurth-Elektronik-datasheet-168488400.pdf?src-supplier=Newark, ComponentLink1URL=https://datasheet.octopart.com:443/74405042068-Wurth-Elektronik-datasheet-168488400.pdf?src-supplier=Newark, ComponentLink2Description=https://datasheet.octopart.com:443/74405042068-W%C3%BCrth-Elektronik-datasheet-82513422.pdf?src-supplier=Farnell, ComponentLink2URL=https://datasheet.octopart.com:443/74405042068-W%C3%BCrth-Elektronik-datasheet-82513422.pdf?src-supplier=Farnell, Description 1="WE-LQSH SMT Semi-Shielded Power Inductor", Height=2mm, Length=4mm, Min Operating Temperature=-40°C, Pricing="1=0.79, 10=0.785, 50=0.654, 100=0.496, 1000=0.432, 10000=0.418 (USD)", RoHS=Compliant, Stock=850, Supplier 1=Mouser, Width=4mm
MH1 MH2 MH3 MH4: "MOUNTING HOLE 3.1mm"
Q1: library part "PMOS MCQ7328-TP", "DUAL P MOSFET MCQ7328-TP", Case/Package=SOIC, Continuous Drain Current (ID)=5.8A, Drain to Source Breakdown Voltage=-40V, Drain to Source Resistance=45mΩ, Drain to Source Voltage (Vdss)=40V, Gate to Source Voltage (Vgs)=20V, Input Capacitance=1.64nF, Manufacturer 1="Diodes Inc.", Manufacturer Part Number=DMP4025LSD-13, Max Operating Temperature=150°C, Max Power Dissipation=1.8W, Min Operating Temperature=-55°C, Supplier Part Number 1=621-DMP4025LSD-13, Threshold Voltage=-1.3V, Category=MOSFETs, China RoHS=Compliant, Country of Origin="Mainland China", Description 1="Transistor MOSFET Array Dual P-CH 40V 7.6A 8-Pin SOIC T/R", Export Control Classification Number (ECCN) Code=EAR99, Fall Time=30.9ns, Height=1.5mm, Introduction Date=2012-06-27, Lead Free="Lead Free", Length=4.95mm, Lifecycle Status=NRND, Min Breakdown Voltage=40V, Mount="Surface Mount", Number of Channels=2, Number of Elements=2, Number of Pins=8, Number of Terminals=8, Power Dissipation=1.8W, Pricing="1=1.25, 10=0.865, 50=0.865, 100=0.497, 1000=0.386, 10000=0.312 (USD)", Rds On Max=25mΩ, REACH SVHC=Yes, Rise Time=14.7ns, RoHS=Compliant, Schedule B="8541290080, 8541290080|8541290080|8541290080|8541290080|8541290080", Stock=7458, Supplier 1=Mouser, Turn-Off Delay Time=53.7ns, Turn-On Delay Time=6.9ns, Weight=73.992255mg, Width=3.95mm
Q2 Q?: "PMOS 20VDS 2.8A", Case/Package=TO-236-3, Continuous Drain Current (ID)=1.6A, Current Rating=-1.6A, Drain to Source Breakdown Voltage=-20V, Drain to Source Resistance=115mΩ, Gate to Source Voltage (Vgs)=8V, Input Capacitance=451pF, Manufacturer 1=onsemi, Manufacturer Lifecycle Status=ACTIVE, Max Junction Temperature (Tj)=150°C, Max Power Dissipation=500mW, Min Breakdown Voltage=20V, Min Operating Temperature=-55°C, Supplier Part Number 1=512-FDN338P, Threshold Voltage=-800mV, Category=MOSFETs, China RoHS=Compliant, Contact Plating=Tin, Country of Origin=Philippines, Description 1="P-Channel PowerTrench® MOSFET, 2.5V Specified, -20V, -1.6A, 115mΩ", Drain to Source Voltage (Vdss)=-20V, Element Configuration=Single, Export Control Classification Number (ECCN) Code=EAR99, Fall Time=11ns, Harmonized Tariff Schedule (HTS) Code=8541.21.00.95, Height=1.22mm, Introduction Date=1997-06-01, Lead Free="Lead Free", Lifecycle Status=Production, Manufacturer Part Number=FDN338P, Max Operating Temperature=150°C, Mount="Surface Mount", Nominal Vgs=-800mV, Number of Channels=1, Number of Elements=1, Number of Pins=3, Number of Terminals=3, Packaging="Cut Tape", Power Dissipation=500mW, Pricing="1=1.24, 10=0.857, 50=0.857, 100=0.542, 1000=0.248, 10000=0.22 (USD)", Radiation Hardening=No, Rds On Max=115mΩ, REACH SVHC=Yes, Resistance=115mΩ, Rise Time=11ns, RoHS=Compliant, Stock=1459, Supplier 1=Mouser, Turn-Off Delay Time=16ns, Turn-On Delay Time=10ns, Voltage Rating (DC)=-20V, Weight=30mg, Width=3.05mm
R1 R2 R4 R5 R6 R8: library part R1KΩ, "SMD Chip Resistor, 1 kOhm, ï¿½ 1%, 100 mW, 0603 [1608 Metric], Thick Film, General Purpose", Case Code (Imperial)=0603, Case Code (Metric)=1608, Manufacturer=Yageo, Manufacturer Part Number=RC0603FR-101KL, Max Operating Temperature=155°C, Min Operating Temperature=-55°C, Power Rating=100mW, Resistance=1kR, Resistance Tolerance=1%, Resistor Type="Thick Film", Temperature Coefficient=100ppm/°C, Voltage Rating=50V, Case/Package=0603, Category="Chip SMD Resistors", Contact Plating=Tin,Lead, Height=0.45mm, Length=1.6mm, Number of Pins=2, Packaging="Tape and Reel", Pricing 1="1=0.1, 10=0.01, 50=0.01, 100=0.007, 1000=0.005, 10000=0.002 (USD)", Reach SVHC Compliant=Unknown, RoHS=Yes, RoHS Compliant=Yes, Series=RC, Stock 1=45082, Supplier 1=Mouser, Termination=SMD/SMT, Tolerance=1%, Voltage Rating (DC)=50V, Width=0.8mm
R3 R9 R10 R16 R?: library part R10KΩ, "SMD Chip Resistor, 10 kOhm, ï¿½ 5%, 100 mW, 0603 [1608 Metric], Thick Film, General Purpose", Case/Package=0603, Manufacturer=Yageo, Manufacturer Part Number=RC0603JR-0710KL, Max Operating Temperature=155°C, Max Power Dissipation=100mW, Min Operating Temperature=-55°C, Resistance=10kR, Temperature Coefficient=100ppm/°C, Tolerance=5%, Voltage Rating (AC)=50V, Category="Chip SMD Resistors", Lead Free="Lead Free", Number of Terminations=2, Pricing 1="1=0.1, 10=0.008, 50=0.008, 100=0.006, 1000=0.005, 10000=0.002 (USD)", Reach SVHC Compliant=Unknown, RoHS=Yes, RoHS Compliant=Yes, Series=RC, Stock 1=1469517, Supplier 1=Mouser
R7: library part R88.7KΩ, "SMD Chip Resistor, 88.7 kOhm, ï¿½ 1%, 100 mW, 0603 [1608 Metric], Thick Film, General Purpose", Case Code (Imperial)=0603, Case Code (Metric)=1608, Manufacturer=Yageo, Manufacturer Part Number=RC0603FR-0788K7L, Max Operating Temperature=155°C, Max Power Dissipation=100mW, Min Operating Temperature=-55°C, Package Quantity=1, Resistance=88.7kR, Temperature Coefficient=100ppm/°C, Tolerance=1%, Voltage Rating=50V, Case/Package=0603, Category="Chip SMD Resistors", Contact Plating=Tin,Matte, Features="Moisture Resistant", Height=0.022inch, Lead Free="Lead Free", Length=0.063inch, Number of Terminations=2, Packaging="Tape and Reel", Power Rating=100mW, Pricing 1="1=0.1, 10=0.009, 50=0.009, 100=0.006, 1000=0.005, 10000=0.002 (USD)", RoHS=Yes, RoHS Compliant=Yes, Series=RC, Size Code=0603, Stock 1=16669, Supplier 1=Mouser, Termination=SMD/SMT, Voltage Rating (DC)=50V, Width=0.031inch
R11: library part R22.1KΩ, "SMD Chip Resistor, 22.1 kOhm, ï¿½ 1%, 100 mW, 0603 [1608 Metric], Thick Film, General Purpose", Case Code (Imperial)=0603, Case Code (Metric)=1608, Manufacturer=Yageo, Manufacturer Part Number=RC0603FR-1322K1L, Max Operating Temperature=155°C, Min Operating Temperature=-55°C, Power Rating=100mW, Resistance=22.1kR, Temperature Coefficient=100ppm/°C, Tolerance=1%, Voltage Rating=50V, Case/Package=0603, Category="Chip SMD Resistors", Contact Plating=Tin,Matte, Height=0.45mm, Lead Free="Lead Free", Length=1.6mm, Packaging="Tape and Reel", Pricing 1="1=0.1, 10=0.003, 50=0.003, 100=0.003, 1000=0.003, 10000=0.003 (USD)", RoHS=Yes, RoHS Compliant=Yes, Series=RC, Stock 1=51738, Supplier 1=Mouser, Termination=SMD/SMT, Width=0.8mm
R12: library part R47KΩ, "SMD Chip Resistor, 47 kOhm, ï¿½ 1%, 100 mW, 0603 [1608 Metric], Thick Film, General Purpose", Capacitance=18pF, Case Code (Imperial)=0603, Case Code (Metric)=1608, Manufacturer=Yageo, Manufacturer Part Number=RC0603FR-0747KL, Max Operating Temperature=155°C, Max Power Dissipation=100mW, Min Operating Temperature=-55°C, Package Quantity=1, Resistance=47kR, Resistance Tolerance=1%, Resistor Type="Thick Film", Temperature Coefficient=100ppm/°C, Voltage Rating=50V, Case/Package=0603, Category="Chip SMD Resistors", Depth=0.8mm, Features="Moisture Resistant", Height=0.022inch, Lead Free="Lead Free", Length=0.063inch, Number of Pins=2, Number of Terminations=2, Packaging="Tape and Reel", Power Rating=100mW, Pricing 1="1=0.1, 10=0.007, 50=0.007, 100=0.007, 1000=0.006, 10000=0.002 (USD)", Radiation Hardening=No, Reach SVHC Compliant=Unknown, RoHS=Yes, RoHS Compliant=Yes, Series=RC, Size Code=0603, Stock 1=2022377, Supplier 1=Mouser, Technology="THICK FILM", Termination=SMD/SMT, Tolerance=1%, Voltage Rating (AC)=50V, Voltage Rating (DC)=50V, Width=0.031inch
R13: library part R4.7KΩ, "Thick Film Resistors - SMD General Purpose Chip Resistor 0603, 4.7kOhms, 1%, 1/10W", Case Code (Imperial)=0603, Case Code (Metric)=1608, Manufacturer 1="Yageo Group", Manufacturer Part Number=RC0603FR-074K7P, Max Operating Temperature=155°C, Max Power Dissipation=100mW, Min Operating Temperature=-55°C, Resistance=4.7kΩ, Supplier Part Number 1=603-RC0603FR-074K7P, Temperature Coefficient=100ppm/°C, Tolerance=1%, Working Voltage=75V, Case/Package=0603, Category="Chip SMD Resistors", China RoHS=Compliant, Composition="Thick Film", Country of Origin="Mainland China, Taiwan", Description 1="Res Thick Film 0603 4.7K Ohm 1% 0.1W(1/10W) ±100ppm/C Pad SMD T/R", Export Control Classification Number (ECCN) Code=EAR99, Features="Moisture Resistant", Harmonized Tariff Schedule (HTS) Code=8533.21.00.30, Height=450µm, Introduction Date=2014-08-22, Length=1.6002mm, Lifecycle Status=Production, Mount="Surface Mount", Number of Terminals=2, Number of Terminations=2, Power Dissipation=100mW, Pricing="1=0.1, 10=0.010, 50=0.010, 100=0.009, 1000=0.008, 10000=0.004 (USD)", REACH SVHC=Yes, RoHS=Compliant, Schedule B="8533210045, 8533210045|8533210045|8533210045|8533210045|8533210045", Stock=23538, Supplier 1=Mouser, Width=800µm
R14 R15: library part R18KΩ, "Resistores de película gruesa - SMD General Purpose Chip Resistor 0603, 18kOhms, 5%, 1/10W", Case/Package=0603, Manufacturer 1="Yageo Group", Manufacturer Part Number=RC0603JR-1018KL, Max Operating Temperature=155°C, Min Operating Temperature=-55°C, Power Dissipation=100mW, Resistance=18kΩ, Supplier Part Number 1=603-RC0603JR-1018KL, Temperature Coefficient=100ppm/°C, Tolerance=5%, Working Voltage=75V, Category="Chip SMD Resistors", China RoHS=Non-Compliant, ComponentLink1Description=https://datasheet.octopart.com:443/RC0603JR-1018KL-Yageo-datasheet-175887523.pdf?src-supplier=IHS, ComponentLink1URL=https://datasheet.octopart.com:443/RC0603JR-1018KL-Yageo-datasheet-175887523.pdf?src-supplier=IHS, ComponentLink2Description=https://datasheet.octopart.com/RC0603JR-1018KL-Yageo-datasheet-73766026.pdf, ComponentLink2URL=https://datasheet.octopart.com/RC0603JR-1018KL-Yageo-datasheet-73766026.pdf, ComponentLink3Description=http://sigma.octopart.com:80/conflict_mineral_statement/Yageo-company-3.pdf?src-supplier=Compliance+Statements, ComponentLink3URL=http://sigma.octopart.com:80/conflict_mineral_statement/Yageo-company-3.pdf?src-supplier=Compliance+Statements, ComponentLink4Description=http://sigma.octopart.com:80/rohs_statement/Yageo-company-2.pdf?src-supplier=Compliance+Statements, ComponentLink4URL=http://sigma.octopart.com:80/rohs_statement/Yageo-company-2.pdf?src-supplier=Compliance+Statements, Composition="Thick Film", Contact Plating=Tin, Description 1="Fixed Resistor, Metal Glaze/thick Film, 0.1W, 18000ohm, 75V, 5% +/-Tol, 100ppm/Cel, Surface Mount, 0603", Export Control Classification Number (ECCN) Code=EAR99, Harmonized Tariff Schedule (HTS) Code=8533.21.00.30, Height=450µm, Introduction Date=2009-07-17, Lifecycle Status=Production, Mount="Surface Mount", Number of Terminals=2, Packaging="Tape & Reel", Pricing="1=0.1, 10=0.004, 50=0.004, 100=0.004, 1000=0.004, 10000=0.002 (USD)", Radiation Hardening=No, REACH SVHC=Yes, RoHS=Compliant, Stock=76843, Supplier 1=Mouser, Width=800µm
SW1: library part 219-3MST, "Switch DIP ON OFF SPST 3 Raised Slide 0.1A 20VDC Gull Wing 2000Cycles 2.54mm SMD Tube", Current Rating=100mA, Manufacturer=CTS, Max Operating Temperature=85°C, Max Voltage Rating (DC)=20V, Min Operating Temperature=-55°C, Package Quantity=60, Actuator Type="Slide (Standard)", Category="DIP Switches", Contact Material=Copper, Contact Plating=Gold,Tin, Depth=9.91mm, Electrical Life=2000Cycles, Lead Free="Lead Free", Length=9.09mm, Manufacturer Part Number=219-3MST, Max Current Rating=100mA, Mechanical Life=2000Cycles, Mount="Surface Mount", Number of Positions=3, Orientation=Straight, Packaging=Rail/Tube, Pricing 1="1=0.68, 10=0.509, 50=0.509, 100=0.509, 1000=0.41, 10000=0.359 (USD)", Pricing 2="1=0.68, 10=0.509, 50=0.509, 100=0.509, 1000=0.41, 10000=0.359 (USD)", Radiation Hardening=No, RoHS=Yes, RoHS Compliant=Yes, Series=219, Stock 1=6563, Stock 2=6563, Supplier 1=Mouser, Supplier 2=Mouser, Terminal Pitch=2.54mm, Termination="Gull Wing", Throw Configuration=SPST, Voltage Rating (DC)=20V, Washable=Yes
SW2 SW3: library part "PTS810SJK250SMTR LFS", "Switch Tactile N.O. SPST Button J-Bend 0.05A 16VDC 50000Cycle 2.55N SMD T/R", Case/Package=SMD/SMT, Color=White, Current Rating=50mA, Manufacturer="ITT C&K", Manufacturer Part Number=PTS810SJK250SMTRLFS, Max Operating Temperature=85°C, Min Operating Temperature=-40°C, Operating Force=260gf, Package Quantity=2900, Voltage Rating (DC)=16V, Contact Plating=Silver, Illumination Type=Non-Illuminated, Lead Free="Lead Free", Mechanical Life=50000Cycles, Mount="Surface Mount", Number of Positions=2, Packaging="Tape and Reel", Pricing 1="1=0.58, 10=0.429, 50=0.429, 100=0.353, 1000=0.313, 10000=0.231 (USD)", RoHS=Yes, RoHS Compliant=Yes, Series=PTS810, Stock 1=28271, Supplier 1=Mouser, Switch Function=Off-Mom, Switch Travel=0.15mm, Throw Configuration=SPST
SW4: library part SS12D00, Current Rating=100mA, Manufacturer=CTS, Manufacturer Part Number=219-3MST, Max Operating Temperature=85°C, Max Voltage Rating (DC)=20V, Min Operating Temperature=-55°C, Package Quantity=60, Actuator Type="Slide (Standard)", Category="DIP Switches", Contact Material=Copper, Contact Plating=Gold,Tin, Depth=9.91mm, Electrical Life=2000Cycles, Lead Free="Lead Free", Length=9.09mm, Max Current Rating=100mA, Mechanical Life=2000Cycles, Mount="Surface Mount", Number of Positions=3, Orientation=Straight, Packaging=Rail/Tube, Pricing 1="1=0.68, 10=0.509, 50=0.509, 100=0.509, 1000=0.41, 10000=0.359 (USD)", Pricing 2="1=0.68, 10=0.509, 50=0.509, 100=0.509, 1000=0.41, 10000=0.359 (USD)", Radiation Hardening=No, RoHS=Yes, RoHS Compliant=Yes, Series=219, Stock 1=6563, Stock 2=6563, Supplier 1=Mouser, Supplier 2=Mouser, Terminal Pitch=2.54mm, Termination="Gull Wing", Throw Configuration=SPST, Voltage Rating (DC)=20V, Washable=Yes
U1: "Risc Microcontroller, 8-BIT, Flash, AVR Risc Cpu, 20MHZ, Cmos, PQFP32", Case/Package=A, Frequency=20MHz, Manufacturer=Microchip, Max Operating Temperature=85°C, Max Supply Voltage=5.5V, Min Operating Temperature=-40°C, Min Supply Voltage=1.8V, Package Quantity=250, Category=Microcontrollers, Core Architecture=AVR, Data Bus Width=8b, Height=1mm, Interface=I2C,SPI,USART, Lead Free="Lead Free", Length=7mm, Manufacturer Part Number=ATMEGA328P-AU, Max Frequency=20MHz, Memory Size=32KB, Memory Type=FLASH, Mount="Surface Mount", Number of A/D Converters=1, Number of ADC Channels=8, Number of I2C Channels=1, Number of I/Os=23, Number of Pins=32, Number of Programmable I/O=23, Number of PWM Channels=6, Number of SPI Channels=1, Number of Timers/Counters=3, Oscillator Type=Internal, Packaging=Tray, Peripherals="Brown-out Detect/Reset,POR,PWM,WDT", Pricing 2="1=2.66, 10=2.66, 50=2.44, 100=2.2, 1000=2.2, 10000=2.2 (USD)", Radiation Hardening=No, RAM Size=2KB, Reach SVHC Compliant=Yes, RoHS=Yes, RoHS Compliant=Yes, Series=ATmega328P, Stock 2=19185, Supplier 1=Mouser, Supplier 2=Mouser, Watchdog Timer=Yes, Weight=0.002469oz, Width=7mm
U2: "Automotive qualified SIMPLE SWITCHER 4-V to 36-V, 1-A synchronous step-down converter 6-SOT-23 -40 to 150", Manufacturer="Texas Instruments", Category="Voltage Regulators - Switching", Manufacturer Part Number=LMR50410YQDBVRQ1, Pricing 1="1=1.44, 10=0.951, 50=0.951, 100=0.793, 1000=0.738, 10000=0.714 (USD)", RoHS=Yes, Stock 1=16266, Supplier 1=Mouser
U3 U4: "Brushed DC Motor Driver With PWM Control 6.5V to 45V 8-Pin SOPowerPAD T/R", Manufacturer="Texas Instruments", Manufacturer Lifecycle Status=ACTIVE, Manufacturer Part Number=DRV8872DDAR, Max Operating Temperature=125°C, Max Output Current=3.6A, Min Operating Temperature=-40°C, Operating Supply Voltage=45V, Category="Motor Drivers", ComponentLink1Description=https://sigma.octopart.com:443/104526336/technical_drawing/Texas-Instruments-DRV8871DDAR.pdf?src-supplier=Texas+Instruments, ComponentLink1URL=https://sigma.octopart.com:443/104526336/technical_drawing/Texas-Instruments-DRV8871DDAR.pdf?src-supplier=Texas+Instruments, ComponentLink2Description=https://octopart.com:443/opatz8j6/c1?t=eovAouxq1ql5NErN5noCIYtz9tWJrXcwJH4IBEA3OpyBNCbX9ft7yopw4ue9x_XAPThjFx7YREnroSUWrHImAajCyiwiaQxklctOD_iyhqUObfCdktjK-RCCnQmDAUGJ3cBfkab-OZlx3ML2okEgysUwe4wzBcr3zRuKZfAglX7wJFbNxSlY0EWkLukCwQAdRfImK5LRiohywoR99RCT8i75kwwqbmaBx4SOvJyF_UZCBvcx-Wai0_-9bLbkHs9dcWhJXjgl9Z51ewMipxS1kltstwmSaap52YtCPluIPaUa74crir1nqgGhL86_jkS4ibHX8gBeP6Zs2j_tFgM4BX6aTawvX3NdaGwAs6-jOXUDwTMkKNPVyxMrIsFWDn39AjdJCl4&src-supplier=Texas+Instruments, ComponentLink2URL=https://octopart.com:443/opatz8j6/c1?t=eovAouxq1ql5NErN5noCIYtz9tWJrXcwJH4IBEA3OpyBNCbX9ft7yopw4ue9x_XAPThjFx7YREnroSUWrHImAajCyiwiaQxklctOD_iyhqUObfCdktjK-RCCnQmDAUGJ3cBfkab-OZlx3ML2okEgysUwe4wzBcr3zRuKZfAglX7wJFbNxSlY0EWkLukCwQAdRfImK5LRiohywoR99RCT8i75kwwqbmaBx4SOvJyF_UZCBvcx-Wai0_-9bLbkHs9dcWhJXjgl9Z51ewMipxS1kltstwmSaap52YtCPluIPaUa74crir1nqgGhL86_jkS4ibHX8gBeP6Zs2j_tFgM4BX6aTawvX3NdaGwAs6-jOXUDwTMkKNPVyxMrIsFWDn39AjdJCl4&src-supplier=Texas+Instruments, ComponentLink3Description=https://datasheet.octopart.com:443/DRV8871DDAR-Texas-Instruments-datasheet-45082942.pdf?src-supplier=Texas+Instruments, ComponentLink3URL=https://datasheet.octopart.com:443/DRV8871DDAR-Texas-Instruments-datasheet-45082942.pdf?src-supplier=Texas+Instruments, ComponentLink4Description=https://sigma.octopart.com:443/49250132/technical_drawing/Texas-Instruments-DRV8871DDAR.pdf?src-supplier=Texas+Instruments, ComponentLink4URL=https://sigma.octopart.com:443/49250132/technical_drawing/Texas-Instruments-DRV8871DDAR.pdf?src-supplier=Texas+Instruments, ComponentLink5Description=https://datasheet.octopart.com:443/DRV8871DDAR-Texas-Instruments-datasheet-164414318.pdf?src-supplier=SHENGYU+ELECTRONICS, ComponentLink5URL=https://datasheet.octopart.com:443/DRV8871DDAR-Texas-Instruments-datasheet-164414318.pdf?src-supplier=SHENGYU+ELECTRONICS, ComponentLink6Description=http://sigma.octopart.com:80/reach_statement/Texas-Instruments-company-64.pdf?src-supplier=Compliance+Statements, ComponentLink6URL=http://sigma.octopart.com:80/reach_statement/Texas-Instruments-company-64.pdf?src-supplier=Compliance+Statements, ComponentLink7Description=http://sigma.octopart.com:80/conflict_mineral_statement/Texas-Instruments-company-63.pdf?src-supplier=Compliance+Statements, ComponentLink7URL=http://sigma.octopart.com:80/conflict_mineral_statement/Texas-Instruments-company-63.pdf?src-supplier=Compliance+Statements, Description 2="50-V, 3.6-A H-bridge motor driver with integrated current sensing 8-SO PowerPAD -40 to 125", Fault Protection="Over Temperature", Height=1.7mm, Interface=PWM, Lead Free="Lead Free", Length=4.89mm, Lifecycle Status=Production, Manufacturer 2="Texas Instruments", Mount="Surface Mount", Number of Pins=8, Output Current=3.6A, Packaging="Cut Tape", Pricing="1=2.73, 10=2.04, 50=1.86, 100=1.67, 1000=1.48, 10000=1.4 (USD)", Pricing 1="1=2.13, 10=1.44, 50=1.44, 100=1.29, 1000=1.09, 10000=0.983 (USD)", RoHS=Yes, RoHS Compliant=Yes, Schedule B="8542390000, 8542390000|8542390000|8542390000|8542390000|8542390000", Series=-, Stock=2652, Stock 1=25767, Supplier 1=Mouser, Supplier 2=Mouser, Supplier Part Number 2=595-DRV8871DDAR, Technology=NMOS, Thickness=1.48mm, Width=3.9mm
VR1: "Cermet trimmer potentiometer, 10 kΩ, 0.1 W, SMD, on top, TC33X-2-103E", Color=Silver, Manufacturer=Bourns, Manufacturer Part Number=TC33X-2-103E, Max Operating Temperature=100°C, Max Power Dissipation=100mW, Min Operating Temperature=-40°C, Package Quantity=1, Resistance=10kR, Resistance Tolerance=25%, Resistor Type=Cermet, Temperature Coefficient=250ppm/°C, Voltage Rating (DC)=50V, Category="Variable Resistors and Potentiometers", Depth=3.8mm, Height=0.047inch, Lead Free="Lead Free", Length=3mm, Military Standard=Not, Mount="Surface Mount", Number of Turns=1, Packaging="Tape and Reel", Power Rating=100mW, Pricing 1="1=0.32, 10=0.23, 50=0.23, 100=0.197, 1000=0.173, 10000=0.12 (USD)", Radiation Hardening=No, Reach SVHC Compliant=No, RoHS=Yes, RoHS Compliant=Yes, Series=TC33, Stock 1=61518, Supplier 1=Mouser, Taper=Linear, Termination="Foot Print", Tolerance=25%, Weight=29.4mg, Width=0.118inch
Y1: library part "RESONATOR 16MHZ CSTCE16M0V53-R0"

## Nets (pads, with @x,y where several pads share a name; then routed paths per layer and width w, separated by ;. In a path a pad name is that pad's centre, name@x,y a point inside that pad or via, vN(x,y) a via of type N, cw(c..) or ccw(c..) an arc to the next point about the centre after c; other vN are vias at no path point)
5V: C9.2 C10.2 L1.2 Q?.3 R7.2
5V_SYS: C2.2 C3.2 C4.2 C5.2 D1.2 D2.2 D?.1 J1.2 J9.1 JP2.1 JP3.1 Q2.2 Q?.2 R3.2 R8.2 R16.1 VR1.3
GND: C2.1 C3.1 C4.1 C5.1 C6.1 C7.1 C9.1 C10.1 C11.1 C12.1 C13.1 C14.1 C15.1 C16.1 C17.1 C18.1 C19.1 C20.1 C21.1 C22.1 D5.1 J1.4 J2.4 J3.4 J4.4 J5.4 J6.4 J7.4 J8.GND J9.2 J?.2 JP1.1 MH1.13 MH2.13 MH3.13 MH4.13 R10.2 R11.1 R13.2 R14.1 R15.1 R?.2 SW2.1 SW2.2 SW3.1 SW3.2 U2.2 U3.1 U3.7 U3.9 U4.1 U4.7 U4.9 VR1.1
LIPO: J?.1 Q1.7 Q1.8
NetC1_1: C1.1
NetC1_2: C1.2 J8.DTR
NetC6_2: C6.2 R3.1 SW2.3 SW2.4
NetC7_2: C7.2 SW3.3 SW3.4
NetC8_1: C8.1 U2.1
NetC8_2: C8.2 L1.1 U2.6
NetD1_1: D1.1 R1.2
NetD2_1: D2.1 R2.2
NetD4_1: D4.1 R4.2
NetD4_2: D4.2 R6.2
NetD4_3: D4.3 JP2.2
NetD4_4: D4.4 R5.2
NetD5_2: D5.2 R8.1
NetJ1_3: J1.3
NetJ2_3: J2.3
NetJ3_3: J3.3
NetJ4_3: J4.3
NetJ5_3: J5.3
NetJ6_3: J6.3
NetJ7_3: J7.3
NetJ8_RX: J8.RX
NetJ8_TX: J8.TX
NetJ9_3: J9.3
NetJ11_1: J11.1 U3.6
NetJ11_2: J11.2 U3.8
NetJ12_1: J12.1 U4.6
NetJ12_2: J12.2 U4.8
NetJP1_A: JP1.2 SW1.1 SW1.2 SW1.3
NetQ1_G_A: Q1.2 Q1.4 R9.1 SW4.2
NetQ1_S_A: Q1.1 Q1.3 R9.2
NetQ2_G: Q2.1 R16.2
NetR1_1: R1.1
NetR2_1: R2.1
NetR4_1: R4.1 SW1.6
NetR5_1: R5.1 SW1.5
NetR6_1: R6.1 SW1.4
NetR7_1: R7.1 R11.2 U2.3
NetR10_1: R10.1 SW4.1
NetR12_2: R12.2 R13.1
NetR14_2: R14.2 U3.4
NetR15_2: R15.2 U4.4
NetU3_2: U3.2
NetU3_3: U3.3
NetU4_2: U4.2
NetU4_3: U4.3
NetVR1_2: VR1.2
VCC: J2.2 J3.2 J4.2 J5.2 J6.2 J7.2 JP3.2 Q2.3
VMOT: C11.2 C12.2 C13.2 C14.2 C15.2 C16.2 C17.2 C18.2 C19.2 C20.2 C21.2 C22.2 Q1.5 Q1.6 R12.1 U2.4 U2.5 U3.5 U4.5
VUSB: D?.2 J8.5V Q?.1 R?.1
pads on no net: J9.4 SW4.3 U1.1 U1.2 U1.3 U1.4 U1.5 U1.6 U1.7 U1.8 U1.9 U1.10 U1.11 U1.12 U1.13 U1.14 U1.15 U1.16 U1.17 U1.18 U1.19 U1.20 U1.21 U1.22 U1.23 U1.24 U1.25 U1.26 U1.27 U1.28 U1.29 U1.30 U1.31 U1.32 Y1.1 Y1.2 Y1.3

## Silkscreen, mask and mechanical layers (free items; w line width, h text height)
Top Overlay:
  text "SPATAN MINI HW2.0" at 49.342,12.96 h0.8
  text "2S-4S" at 4.46,12.579 h0.8 r270
Mechanical 1:
  lines w0.1: 0,5 0,3 ; 0,7.5 70,7.5 ; 4,0 67,0 ccw(c67,3) 70,3 70,10.768 ; 7,0 3,0 cw(c3,3) 0,3 ; 35,0 35,15 ; 63,20 67,20 cw(c67,17) 70,17 70,10 ; 66,20 3,20 ccw(c3,17) 0,17 0,3 ; 70,7.5 ccw(c70,7.5) 70,7.5

## Text inside footprints (layer, text, board x,y; h text height)
J1: Top Overlay "VCC" at 31.035,16.2 h0.7; Top Overlay "SIG" at 33.555,16.2 h0.7; Top Overlay "GND" at 36.407,16.2 h0.7
J2: Top Overlay "VCC" at 39.035,16.2 h0.7; Top Overlay "SIG" at 41.555,16.2 h0.7; Top Overlay "GND" at 44.407,16.2 h0.7
J3: Top Overlay "VCC" at 47.035,16.2 h0.7; Top Overlay "SIG" at 49.555,16.2 h0.7; Top Overlay "GND" at 52.407,16.2 h0.7
J4: Top Overlay "VCC" at 55.035,16.2 h0.7; Top Overlay "SIG" at 57.555,16.2 h0.7; Top Overlay "GND" at 60.407,16.2 h0.7
J5: Top Overlay "VCC" at 23.035,16.2 h0.7; Top Overlay "SIG" at 25.555,16.2 h0.7; Top Overlay "GND" at 28.407,16.2 h0.7
J6: Top Overlay "VCC" at 15.035,16.2 h0.7; Top Overlay "SIG" at 17.555,16.2 h0.7; Top Overlay "GND" at 20.407,16.2 h0.7
J7: Top Overlay "VCC" at 7.035,16.2 h0.7; Top Overlay "SIG" at 9.555,16.2 h0.7; Top Overlay "GND" at 12.407,16.2 h0.7
J8: Top Overlay "DTR" at 35.947,0.2 h0.7; Top Overlay "GND" at 25.847,0.2 h0.7; Top Overlay "RX" at 28.055,0.2 h0.7; Top Overlay "TX" at 30.555,0.2 h0.7; Top Overlay "5V" at 33.347,0.2 h0.7
J9: Top Overlay "GND" at 28.3,10.325 h0.7 r90; Top Overlay "GO" at 28.3,7.825 h0.7 r90; Top Overlay "RDY" at 28.3,5.617 h0.7 r90; Top Overlay "5V" at 28.3,13.117 h0.7 r90
J11: Top Overlay "MOTOR" at 50.134,0.4 h0.7
J12: Top Overlay "MOTOR" at 56.634,0.4 h0.7
J?: Top Overlay "+" at 0.717,12.533 h0.7 r270; Top Overlay "_" at 0.75,8.433 h0.7 r270; Top Overlay "BATT" at 0.75,11.816 h0.7 r270